# Altium PCB CSU18M88+CS1259-V1.1.PcbDoc (part 2 of 2)
Units mm, origin at the board's own origin, x right, y up, seen from the top; angles counter-clockwise.
Board outline 33.46 x 68.06 mm, 2 copper layers (TopLayer, BottomLayer); 63 components, 66 nets, 230 pads, 165 vias.
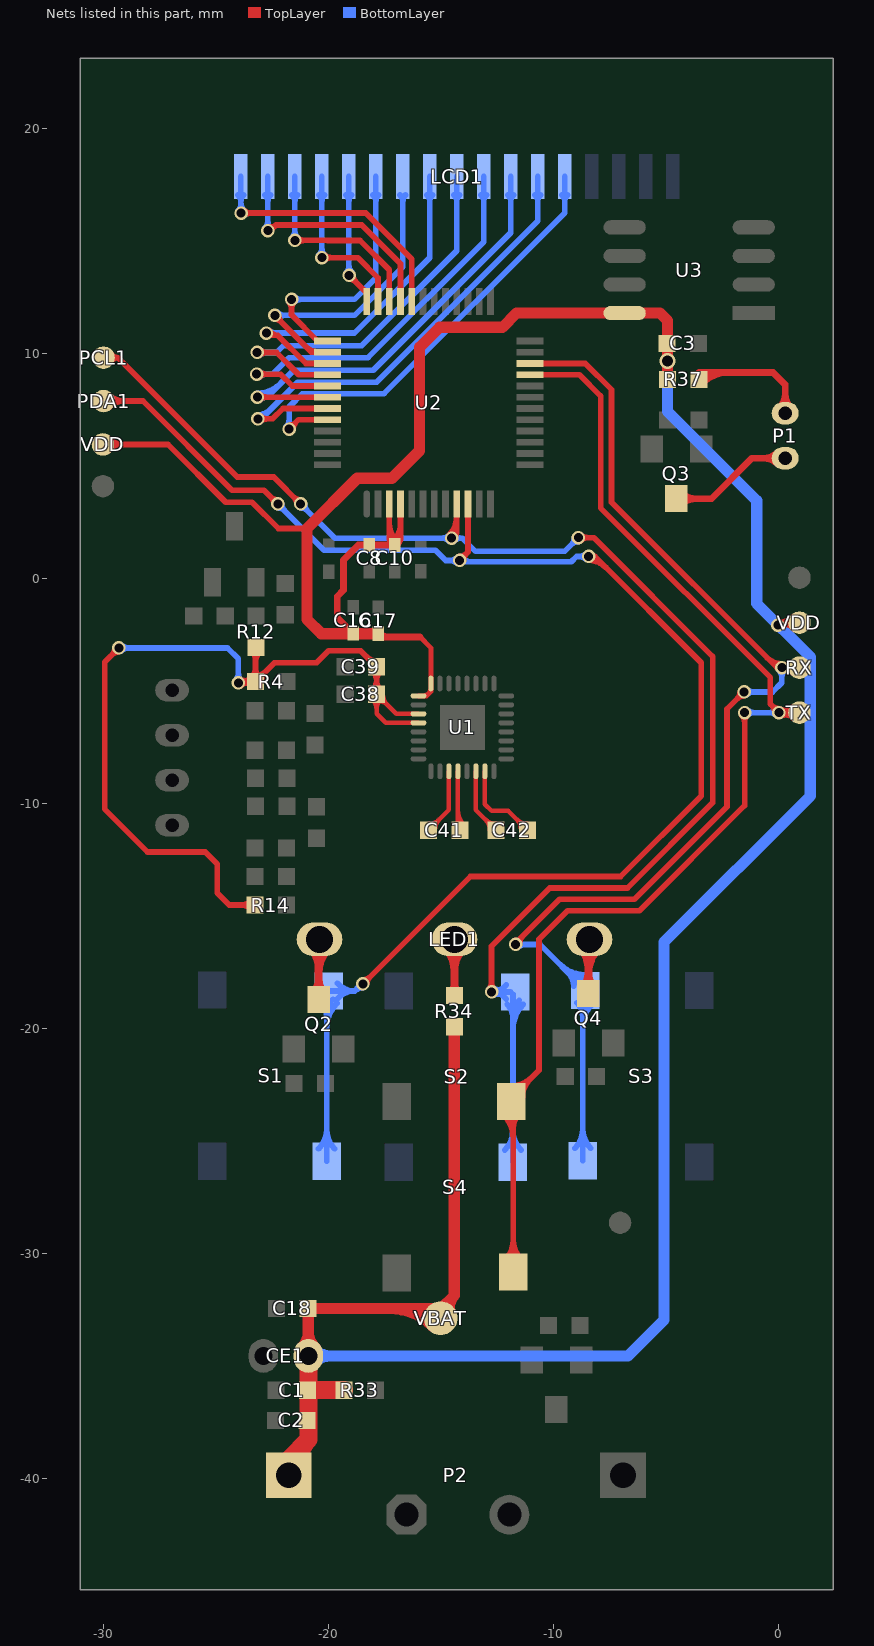
[diagram p2: the nets of this part, all layers, seen from the top]

## Via types
v1: diameter 0.6, hole 0.4, TopLayer to BottomLayer, 164 vias
v2: diameter 0.7, hole 0.5, TopLayer to BottomLayer, 1 vias

## Nets (pads, with @x,y where several pads share a name; then routed paths per layer and width w, separated by ;. In a path a pad name is that pad's centre, name@x,y a point inside that pad or via, vN(x,y) a via of type N, cw(c..) or ccw(c..) an arc to the next point about the centre after c; other vN are vias at no path point) (continued)
NetC41_1: C41.1 U1.12 | length 4.1
  TopLayer w0.2: C41.1@-14.346,-11.003 ccw(c-14.589,-10.761) -14.246,-10.761 ; -14.246,-10.768 ccw(c-13.715,-10.768) C41.1@-14.091,-11.144 ; -14.246,-10.285 ccw(c-13.232,-10.285) C41.1@-13.949,-11.003 ; U1.12@-14.246,-8.579 -14.246,-11.103 C41.1@-14.148,-11.201
NetC41_2: C41.2 U1.11 | length 4.1
  TopLayer w0.2: C41.2@-15.545,-11.201 -14.646,-10.303 U1.11@-14.646,-8.579 ; C41.2@-15.545,-10.92 ccw(c-15.545,-10.242) -15.065,-10.722 ccw(c-14.585,-11.201) C41.2@-15.264,-11.201
NetC42_1: C42.1 U1.14 | length 4.1
  TopLayer w0.2: U1.14@-13.446,-8.579 -13.446,-10.303 C42.1@-12.548,-11.201 ; C42.1@-12.829,-11.201 ccw(c-13.507,-11.201) -13.027,-10.722 ccw(c-12.548,-10.242) C42.1@-12.548,-10.92
NetC42_2: C42.2 U1.15 | length 4.9
  TopLayer w0.2: U1.15@-13.046,-8.579 -13.046,-10.042 -12.751,-10.338 -12.014,-10.338 C42.2@-11.151,-11.201 ; C42.2@-11.432,-11.201 ccw(c-12.11,-11.201) -11.63,-10.722 ccw(c-11.151,-10.242) C42.2@-11.151,-10.92
NetJ5_2: 
NetLED1_1: LED1.1 Q2.3 | length 6
  TopLayer w0.35: LED1.1@-20.803,-16.459 cw(c-21.695,-17.352) -20.433,-17.352 ; Q2.3@-20.663,-18.392 ccw(c-21.218,-17.837) -20.433,-17.837 ccw(c-19.649,-17.837) Q2.3@-20.203,-18.392 ; Q2.3@-20.433,-18.722 LED1.1@-20.433,-16.09 ; -20.433,-17.53 cw(c-18.919,-17.53) LED1.1@-19.99,-16.459
NetLED1_2: LED1.2 R34.2 | length 5.5
  TopLayer w0.254: LED1.2@-14.402,-16.058 LED1.2@-14.396,-16.053
  TopLayer w0.35: LED1.2@-14.803,-16.459 cw(c-15.771,-17.427) -14.402,-17.427 ; R34.2@-14.547,-18.396 ccw(c-14.899,-18.045) -14.402,-18.045 ccw(c-13.904,-18.045) R34.2@-14.256,-18.396 ; R34.2@-14.402,-18.542 LED1.2@-14.402,-16.058 ; -14.402,-17.455 cw(c-12.994,-17.455) LED1.2@-13.99,-16.459
NetLED2_1: 
NetLED2_2: LED1.3 Q4.3 | length 5.8
  TopLayer w0.254: LED1.3@-8.444,-16.101 LED1.3@-8.396,-16.053
  TopLayer w0.35: LED1.3@-8.803,-16.459 cw(c-9.668,-17.325) -8.444,-17.325 ; Q4.3@-8.674,-18.138 ccw(c-9.229,-17.583) -8.444,-17.583 ccw(c-7.66,-17.583) Q4.3@-8.215,-18.138 ; Q4.3@-8.444,-18.468 LED1.3@-8.444,-16.101 ; -8.444,-17.557 cw(c-6.892,-17.557) LED1.3@-7.99,-16.459
NetNTC2_1: 
NetP1_1: P1.2 R37.2 | length 8.6
  TopLayer w0.3: R37.2@-3.579,8.888 cw(c-2.961,8.27) -2.961,9.144 ; R37.2@-3.531,9.144 -0.229,9.144 0.305,8.611 P1.2@0.305,7.334 ; R37.2@-3.367,8.676 cw(c-2.237,7.546) -2.237,9.144 ; P1.2@0.057,7.581 ccw(c-0.54,8.179) 0.305,8.179 ccw(c1.15,8.179) P1.2@0.552,7.581
NetP1_2: P1.1 Q3.3 | length 8.5
  TopLayer w0.3: Q3.3@-4.586,3.279 Q3.3@-4.433,3.431 ; Q3.3@-4.535,3.533 -2.97,3.533 -1.168,5.334 P1.1@0.305,5.334 ; Q3.3@-4.287,3.285 cw(c-3.69,2.688) -3.69,3.533 cw(c-3.69,4.378) Q3.3@-4.287,3.78 ; P1.1@-0.043,5.087 ccw(c-0.64,4.489) -0.64,5.334 ccw(c-0.64,6.179) P1.1@-0.043,5.581
OBJ: 
OBJ-: 
PT24: PDA1.1 S1.1 S1.2 U2.10 | length 81.8
  TopLayer w0.254: PDA1.1@-29.997,7.874 -28.245,7.874 -24.282,3.912 -22.86,3.912 v1(-22.25,3.302) ; PDA1.1@-29.734,7.61 cw(c-29.097,6.974) -29.097,7.874 cw(c-29.097,8.774) PDA1.1@-29.734,8.138 ; v1@-22.423,3.302 ccw(c-22.841,3.302) -22.546,3.597 ccw(c-22.25,3.893) v1@-22.25,3.475 ; v1(-18.466,-18.034) -13.691,-13.259 -7.01,-13.259 -3.429,-9.677 -3.429,-3.759 -8.153,0.965 v1(-8.433,0.965) ; v1@-18.466,-17.861 ccw(c-18.466,-17.443) -18.17,-17.739 ccw(c-17.875,-18.034) v1@-18.293,-18.034 ; v1(-14.173,0.787) -13.795,1.166 U2.10@-13.795,3.298 ; v1@-14.173,0.96 ccw(c-14.173,1.378) -13.878,1.083 ccw(c-13.583,0.787) v1@-14,0.787 ; v1@-8.433,0.792 cw(c-8.433,-0.3) -7.661,0.472 ; v1@-8.433,1.046 cw(c-8.433,0.567) -8.094,0.906
  BottomLayer w0.254: v1@-22.25,3.129 cw(c-22.25,2.711) -21.955,3.007 cw(c-21.66,3.302) v1@-22.077,3.302 ; v1(-22.25,3.302) -20.193,1.245 -15.24,1.245 -14.783,0.787 v1(-14.173,0.787) -14.115,0.729 -9.202,0.729 -8.966,0.965 v1(-8.433,0.965) ; S1.2@-20.438,-25.367 ccw(c-21.305,-24.5) -20.079,-24.5 ccw(c-18.853,-24.5) S1.2@-19.72,-25.367 ; S1.1@-20.337,-18.898 cw(c-20.959,-19.519) -20.079,-19.519 ; S1.2@-20.079,-25.917 S1.1@-20.079,-18.449 ; -20.079,-20.01 cw(c-18.506,-20.01) S1.1@-19.618,-18.898 ; -20.079,-19.397 cw(c-19.119,-19.397) S1.1@-19.798,-18.718 ; S1.1@-19.977,-18.348 -18.83,-18.348 ; S1.1@-19.601,-18.689 cw(c-18.83,-19.388) -18.83,-18.348 ; S1.1@-19.601,-18.006 ccw(c-18.83,-17.307) -18.83,-18.348 ; -18.725,-18.243 ccw(c-18.934,-18.034) v1@-18.639,-18.034 ; v1@-18.472,-18.207 ccw(c-18.489,-18.689) -18.83,-18.348 ; v1(-18.466,-18.034) -18.517,-18.034 -18.83,-18.348 ; v1@-14.296,0.665 ccw(c-14.591,0.37) -14.591,0.787 ccw(c-14.591,1.205) v1@-14.296,0.91 ; v1@-14.051,0.91 ccw(c-13.615,1.346) -13.615,0.729 ; v1@-8.555,0.843 ccw(c-8.85,0.548) -8.85,0.965 ccw(c-8.85,1.383) v1@-8.555,1.088
PT25: PCL1.1 S2.1 S2.2 U2.9 | length 79.3
  TopLayer w0.254: PCL1.1@-29.997,9.804 -29.362,9.804 ; PCL1.1@-29.672,9.623 cw(c-29.362,9.45) -29.362,9.804 ; PCL1.1@-29.672,9.986 ccw(c-29.362,10.158) -29.362,9.804 ; v1@-21.407,3.302 ccw(c-21.825,3.302) -21.53,3.597 ccw(c-21.234,3.893) v1@-21.234,3.475 ; v1(-21.234,3.302) -22.428,4.496 -24.054,4.496 -29.362,9.804 ; v1@-14.651,1.9 ccw(c-15.511,2.761) U2.9@-14.295,2.761 ; v1(-14.529,1.778) -14.295,2.012 ; v1@-14.498,1.948 ccw(c-14.457,2.175) -14.295,2.012 ; v1@-14.472,1.721 ccw(c-14.898,2.147) -14.295,2.147 ; v1@-14.359,1.809 cw(c-14.132,1.849) -14.295,2.012 ; U2.9@-14.295,3.298 -14.295,2.012 ; v1@-12.873,-18.267 ccw(c-13.168,-17.972) -12.751,-17.972 ccw(c-12.333,-17.972) v1@-12.628,-18.267 ; v1(-12.751,-18.39) -12.751,-16.358 -10.16,-13.767 -6.706,-13.767 -2.921,-9.982 -2.921,-3.48 -8.204,1.803 v1(-8.89,1.803) ; v1@-8.768,1.681 cw(c-8.472,1.386) -8.472,1.803 cw(c-8.472,2.221) v1@-8.768,1.926
  BottomLayer w0.254: v1@-21.234,3.129 cw(c-21.234,2.711) -20.939,3.007 cw(c-20.644,3.302) v1@-21.061,3.302 ; v1(-21.234,3.302) -19.71,1.778 v1(-14.529,1.778) -14.046,1.778 -13.462,1.194 -9.5,1.194 v1(-8.89,1.803) ; v1@-14.651,1.656 ccw(c-14.946,1.36) -14.946,1.778 ccw(c-14.946,2.196) v1@-14.651,1.9 ; v1@-14.406,1.656 cw(c-14.111,1.36) -14.111,1.778 cw(c-14.111,2.196) v1@-14.406,1.9 ; v1@-12.664,-18.539 cw(c-12.455,-18.901) -12.347,-18.498 cw(c-12.239,-18.094) v1@-12.601,-18.303 ; v1@-12.664,-18.24 ccw(c-12.455,-17.878) -12.347,-18.282 ccw(c-12.239,-18.685) v1@-12.601,-18.476 ; v1@-12.628,-18.512 cw(c-12.333,-18.807) -12.333,-18.39 cw(c-12.333,-17.972) v1@-12.628,-18.267 ; S2.2@-12.158,-25.413 ccw(c-13.025,-24.546) -11.799,-24.546 ccw(c-10.572,-24.546) S2.2@-11.439,-25.413 ; S2.1@-12.096,-18.708 ccw(c-12.751,-19.222) v1(-12.751,-18.39) ; S2.1@-12.092,-18.075 cw(c-12.751,-17.544) v1(-12.751,-18.39) ; S2.1@-12.056,-18.943 cw(c-12.678,-19.565) -11.799,-19.565 ; S2.1@-11.904,-18.39 v1(-12.751,-18.39) ; S2.2@-11.799,-25.963 S2.1@-11.799,-18.495 ; -11.799,-20.056 cw(c-10.225,-20.056) S2.1@-11.338,-18.943 ; -11.799,-19.443 cw(c-10.838,-19.443) S2.1@-11.517,-18.764 ; v1@-9.063,1.803 cw(c-9.481,1.803) -9.185,1.508 cw(c-8.89,1.213) v1@-8.89,1.63
RX: RX.1 S3.1 S3.2 U2.22 | length 65.9
  TopLayer w0.254: v1(-11.684,-16.281) -11.684,-16.231 -9.728,-14.275 -6.401,-14.275 -2.286,-10.16 -2.286,-5.817 v1(-1.524,-5.055) ; v1@-11.684,-16.108 ccw(c-11.684,-15.813) -11.475,-16.022 ; v1@-11.511,-16.281 cw(c-10.971,-16.281) -11.353,-15.899 ; U2.22@-11.045,9.548 -8.583,9.548 -7.417,8.382 -7.417,3.378 -0.064,-3.975 v1(0.152,-3.975) ; v1@-1.697,-5.055 cw(c-2.115,-5.055) -1.819,-5.35 cw(c-1.524,-5.645) v1@-1.524,-5.228 ; -0.512,-3.526 ccw(c0.152,-2.862) v1@0.152,-3.802 ; v1@0.263,-4.107 cw(c0.414,-4.288) 0.475,-4.061 cw(c0.536,-3.834) v1@0.315,-3.915 ; v1@0.263,-3.842 ccw(c0.414,-3.661) 0.475,-3.888 ccw(c0.536,-4.115) v1@0.315,-4.034 ; v1@0.275,-4.097 cw(c0.57,-4.392) 0.57,-3.975 cw(c0.57,-3.557) v1@0.275,-3.852 ; RX.1@0.651,-4.211 ccw(c0.152,-4.619) v1(0.152,-3.975) ; RX.1@0.651,-3.738 cw(c0.152,-3.33) v1(0.152,-3.975) ; RX.1@0.94,-3.975 v1(0.152,-3.975)
  BottomLayer w0.254: v1(-11.684,-16.281) -10.592,-16.281 -8.692,-18.181 S3.1@-8.692,-25.894 ; v1@-11.562,-16.404 cw(c-11.266,-16.699) -11.266,-16.281 cw(c-11.266,-15.864) v1@-11.562,-16.159 ; -9.711,-17.162 ccw(c-8.591,-16.042) S3.2@-8.591,-17.626 ; -9.353,-17.52 cw(c-9.967,-18.134) S3.2@-9.099,-18.134 ; -9.277,-17.596 ccw(c-8.591,-16.909) S3.2@-8.591,-17.88 ; S3.1@-9.051,-25.344 ccw(c-9.919,-24.477) -8.692,-24.477 ccw(c-7.466,-24.477) S3.1@-8.333,-25.344 ; S3.2@-8.95,-18.874 cw(c-9.572,-19.496) -8.692,-19.496 ; -8.692,-19.987 cw(c-7.119,-19.987) S3.2@-8.231,-18.874 ; -8.692,-19.374 cw(c-7.732,-19.374) S3.2@-8.411,-18.695 ; v1(-1.524,-5.055) -0.254,-5.055 0.152,-4.648 v1(0.152,-3.975) ; v1@-1.402,-5.177 cw(c-1.106,-5.472) -1.106,-5.055 cw(c-1.106,-4.637) v1@-1.402,-4.932 ; v1@0.03,-4.097 cw(c-0.265,-4.392) 0.152,-4.392 cw(c0.57,-4.392) v1@0.275,-4.097
S1: 
S2: 
S3: 
S4: 
SEG0: LCD1.13 U2.44 | length 22.3
  TopLayer w0.254: v1(-21.742,6.629) -21.324,7.048 U2.44@-20.045,7.048 ; v1@-21.742,6.802 ccw(c-21.742,7.22) -21.447,6.925 ccw(c-21.152,6.629) v1@-21.569,6.629
  BottomLayer w0.254: v1@-21.865,6.752 ccw(c-22.16,7.047) -21.742,7.047 ccw(c-21.325,7.047) v1@-21.62,6.752 ; v1(-21.742,6.629) -21.742,7.62 -21.158,8.204 -17.526,8.204 -9.495,16.236 LCD1.13@-9.495,17.856 ; LCD1.13@-9.617,17.034 cw(c-9.912,16.739) -9.495,16.739 cw(c-9.077,16.739) LCD1.13@-9.372,17.034
SEG1: LCD1.12 U2.43 | length 23.3
  TopLayer w0.254: v1(-23.139,7.087) -22.479,7.087 -22.018,7.548 U2.43@-20.045,7.548 ; v1@-23.017,6.964 cw(c-22.722,6.669) -22.722,7.087 cw(c-22.722,7.504) v1@-23.017,7.209
  BottomLayer w0.254: v1(-23.139,7.087) -22.987,7.087 -21.361,8.712 -17.856,8.712 -10.695,15.874 LCD1.12@-10.695,17.856 ; v1@-23.139,7.26 ccw(c-23.139,8.045) -22.584,7.49 ; LCD1.12@-10.817,17.034 cw(c-11.112,16.739) -10.695,16.739 cw(c-10.277,16.739) LCD1.12@-10.572,17.034
SEG2: LCD1.11 U2.42 | length 23.7
  TopLayer w0.254: v1(-23.161,8.048) U2.42@-20.045,8.048 ; v1@-23.038,7.925 cw(c-22.743,7.63) -22.743,8.048 cw(c-22.743,8.465) v1@-23.038,8.17
  BottomLayer w0.254: v1@-23.161,7.967 ccw(c-23.161,8.794) -22.576,8.209 ; v1(-23.161,8.048) -22.737,8.048 -21.539,9.246 -18.009,9.246 -11.895,15.36 LCD1.11@-11.895,17.856 ; v1@-23.161,8.221 ccw(c-23.161,9.662) -22.142,8.643 ; v1@-23.038,7.925 cw(c-22.743,7.63) -22.743,8.048 cw(c-22.743,8.465) v1@-23.038,8.17 ; LCD1.11@-12.017,17.034 cw(c-12.312,16.739) -11.895,16.739 cw(c-11.477,16.739) LCD1.11@-11.772,17.034
SEG3: LCD1.10 U2.41 | length 20.8
  TopLayer w0.254: v1(-23.19,9.068) -22.123,9.068 -21.603,8.548 U2.41@-20.045,8.548 ; v1@-23.068,8.945 cw(c-22.773,8.65) -22.773,9.068 cw(c-22.773,9.485) v1@-23.068,9.19
  BottomLayer w0.254: v1(-23.19,9.068) -22.479,9.068 -21.742,9.804 -18.237,9.804 -13.095,14.947 LCD1.10@-13.095,17.856 ; v1@-23.068,8.945 cw(c-22.773,8.65) -22.773,9.068 cw(c-22.773,9.485) v1@-23.068,9.19 ; LCD1.10@-13.217,17.034 cw(c-13.512,16.739) -13.095,16.739 cw(c-12.677,16.739) LCD1.10@-12.972,17.034
SEG4: LCD1.9 U2.40 | length 19.5
  TopLayer w0.254: v1(-23.165,10.033) -22.301,10.033 -21.316,9.048 U2.40@-20.045,9.048 ; v1@-23.042,9.911 cw(c-22.747,9.615) -22.747,10.033 cw(c-22.747,10.451) v1@-23.042,10.155
  BottomLayer w0.254: v1(-23.165,10.033) -22.301,10.033 -21.996,10.338 -18.517,10.338 -14.295,14.56 LCD1.9@-14.295,17.856 ; v1@-23.042,9.911 cw(c-22.747,9.615) -22.747,10.033 cw(c-22.747,10.451) v1@-23.042,10.155 ; LCD1.9@-14.417,17.034 cw(c-14.712,16.739) -14.295,16.739 cw(c-13.877,16.739) LCD1.9@-14.172,17.034
SEG5: LCD1.8 U2.39 | length 17
  TopLayer w0.254: v1@-22.614,10.991 ccw(c-22.25,11.229) -22.25,10.795 ; v1@-22.555,10.795 -22.25,10.795 ; U2.39@-20.045,9.548 -21.003,9.548 -22.25,10.795
  BottomLayer w0.254: v1(-22.758,10.897) -18.847,10.897 -15.495,14.249 LCD1.8@-15.495,17.856 ; v1@-22.636,10.774 cw(c-22.341,10.479) -22.341,10.897 cw(c-22.341,11.314) v1@-22.636,11.019 ; LCD1.8@-15.617,17.034 cw(c-15.912,16.739) -15.495,16.739 cw(c-15.077,16.739) LCD1.8@-15.372,17.034
SEG6: LCD1.7 U2.38 | length 15.6
  TopLayer w0.254: v1@-22.377,11.511 cw(c-22.377,11.132) -22.109,11.4 ; v1(-22.377,11.684) -22.377,11.668 -20.757,10.048 U2.38@-20.045,10.048 ; v1@-22.204,11.684 ccw(c-21.748,11.684) -22.071,11.361 ; -20.982,10.273 ccw(c-20.495,10.76) U2.38@-20.495,10.071
  BottomLayer w0.254: v1(-22.377,11.684) -18.847,11.684 -16.695,13.836 -16.695,16.764 ; v1@-22.255,11.562 cw(c-21.96,11.266) -21.96,11.684 cw(c-21.96,12.102) v1@-22.255,11.806 ; LCD1.7@-16.817,17.034 cw(c-17.112,16.739) -16.695,16.739 cw(c-16.277,16.739) LCD1.7@-16.572,17.034 ; LCD1.7@-16.811,17.028 cw(c-17.053,16.764) -16.695,16.764 ; LCD1.7@-16.578,17.028 ccw(c-16.337,16.764) -16.695,16.764
SEG7: LCD1.6 U2.37 | length 13.4
  TopLayer w0.254: v1@-21.763,12.273 cw(c-22.058,11.978) -21.641,11.978 cw(c-21.223,11.978) v1@-21.518,12.273 ; v1(-21.641,12.395) -21.641,11.709 -20.479,10.548 U2.37@-20.045,10.548
  BottomLayer w0.254: v1(-21.641,12.395) -18.847,12.395 -17.895,13.347 LCD1.6@-17.895,17.856 ; v1@-21.518,12.273 cw(c-21.223,11.978) -21.223,12.395 cw(c-21.223,12.813) v1@-21.518,12.518 ; LCD1.6@-18.017,17.034 cw(c-18.312,16.739) -17.895,16.739 cw(c-17.477,16.739) LCD1.6@-17.772,17.034
SEG8: LCD1.5 U2.36 | length 8
  TopLayer w0.254: v1@-19.075,13.289 cw(c-19.075,12.871) -18.78,13.167 cw(c-18.485,13.462) v1@-18.902,13.462 ; v1(-19.075,13.462) -18.295,12.681 U2.36@-18.295,12.298 ; -18.447,12.834 ccw(c-18.295,12.987) U2.36@-18.295,12.771
  BottomLayer w0.254: LCD1.5@-19.217,17.034 cw(c-19.512,16.739) -19.095,16.739 cw(c-18.677,16.739) LCD1.5@-18.972,17.034 ; v1@-19.198,13.584 ccw(c-19.447,13.833) -19.095,13.833 ; v1@-19.095,13.462 LCD1.5@-19.095,17.856 ; -19.095,13.926 ccw(c-18.611,13.926) v1@-18.953,13.584
SEG9: LCD1.4 U2.35 | length 9.5
  TopLayer w0.254: v1(-20.295,14.249) -18.694,14.249 -17.795,13.35 U2.35@-17.795,12.298 ; v1@-20.172,14.127 cw(c-19.877,13.832) -19.877,14.249 cw(c-19.877,14.667) v1@-20.172,14.372
  BottomLayer w0.254: v1@-20.417,14.372 ccw(c-20.712,14.667) -20.295,14.667 ccw(c-19.877,14.667) v1@-20.172,14.372 ; LCD1.4@-20.417,17.034 cw(c-20.712,16.739) -20.295,16.739 cw(c-19.877,16.739) LCD1.4@-20.172,17.034 ; v1(-20.295,14.249) LCD1.4@-20.295,17.856
SEG10: LCD1.3 U2.34 | length 11
  TopLayer w0.254: v1(-21.495,15.018) -20.047,15.018 -20.041,15.011 -18.593,15.011 -17.295,13.713 U2.34@-17.295,12.298 ; v1@-21.372,14.895 cw(c-21.077,14.6) -21.077,15.018 cw(c-21.077,15.435) v1@-21.372,15.14
  BottomLayer w0.254: v1@-21.617,15.14 ccw(c-21.912,15.435) -21.495,15.435 ccw(c-21.077,15.435) v1@-21.372,15.14 ; LCD1.3@-21.617,17.034 cw(c-21.912,16.739) -21.495,16.739 cw(c-21.077,16.739) LCD1.3@-21.372,17.034 ; LCD1.3@-21.495,17.856 v1(-21.495,15.018) v1@-21.488,15.011
SEG11: LCD1.2 U2.33 | length 12.6
  TopLayer w0.254: v1@-22.682,15.342 -22.631,15.392 -22.327,15.697 ; v1@-22.642,15.62 ccw(c-22.547,15.918) -22.327,15.697 ; U2.33@-16.795,12.298 -16.795,13.975 -18.517,15.697 -22.327,15.697
  BottomLayer w0.254: v1@-22.817,15.578 ccw(c-23.112,15.873) -22.695,15.873 ccw(c-22.277,15.873) v1@-22.572,15.578 ; LCD1.2@-22.817,17.034 cw(c-23.112,16.739) -22.695,16.739 cw(c-22.277,16.739) LCD1.2@-22.572,17.034 ; LCD1.2@-22.695,17.856 v1(-22.695,15.456) v1@-22.631,15.392
SEG12: LCD1.1 U2.32 | length 13.9
  TopLayer w0.254: v1(-23.876,16.231) -18.339,16.231 -16.295,14.187 U2.32@-16.295,12.298 ; v1@-23.754,16.108 cw(c-23.458,15.813) -23.458,16.231 cw(c-23.458,16.648) v1@-23.754,16.353
  BottomLayer w0.254: LCD1.1@-24.017,17.034 cw(c-24.312,16.739) -23.895,16.739 cw(c-23.477,16.739) LCD1.1@-23.772,17.034 ; v1@-23.998,16.353 ccw(c-24.249,16.603) -23.895,16.603 ; -23.895,16.693 ccw(c-23.413,16.693) v1@-23.754,16.353 ; LCD1.1@-23.895,17.856 -23.895,16.249 v1(-23.876,16.231)
TX: S4.1 S4.2 TX.1 U2.21 | length 67.3
  TopLayer w0.254: S4.2@-12.241,-23.816 cw(c-13.353,-24.929) -11.78,-24.929 ; S4.1@-12.139,-30.286 ccw(c-13.006,-29.419) -11.78,-29.419 ccw(c-10.554,-29.419) S4.1@-11.421,-30.286 ; S4.2@-12.061,-23.637 cw(c-12.74,-24.315) -11.78,-24.315 ; S4.2@-11.882,-22.822 ccw(c-11.882,-22.13) S4.2@-11.393,-22.619 ; S4.2@-11.882,-22.568 ccw(c-11.882,-21.263) -10.959,-22.186 ; S4.1@-11.78,-30.836 -11.78,-23.007 -10.643,-21.869 -10.643,-16.053 -9.373,-14.783 -6.172,-14.783 -1.499,-10.109 v1@-1.499,-6.045 ; -11.78,-24.438 cw(c-10.9,-24.438) S4.2@-11.522,-23.816 ; S4.2@-11.374,-23.076 cw(c-10.226,-23.076) -11.037,-22.264 ; U2.21@-11.045,9.048 -8.845,9.048 -7.899,8.103 -7.899,3.124 -0.356,-4.42 -0.356,-5.594 v1(0.025,-5.975) TX.1@0.94,-5.975 ; v1@-1.627,-6.097 cw(c-1.935,-6.406) -1.499,-6.406 ; -1.499,-6.379 cw(c-1.1,-6.379) v1@-1.382,-6.097 ; v1@-0.148,-5.975 ccw(c-0.565,-5.975) -0.27,-5.679 ccw(c0.025,-5.384) v1@0.025,-5.802 ; v1@0.112,-6.124 cw(c0.327,-6.497) 0.438,-6.081 ; v1@0.112,-5.825 ccw(c0.327,-5.452) 0.438,-5.868 ; v1@0.148,-6.097 cw(c0.443,-6.392) 0.443,-5.975 cw(c0.443,-5.557) v1@0.148,-5.852 ; v1@0.175,-6.061 cw(c0.526,-6.264) 0.421,-5.872 ; v1@0.175,-5.888 ccw(c0.526,-5.685) 0.421,-6.077 ; TX.1@0.676,-6.238 ccw(c0.039,-6.875) 0.039,-5.975 ccw(c0.039,-5.074) TX.1@0.676,-5.711
  BottomLayer w0.254: v1(-1.504,-5.975) v1(0.025,-5.975) ; v1@-1.382,-6.097 cw(c-1.087,-6.392) -1.087,-5.975 cw(c-1.087,-5.557) v1@-1.382,-5.852 ; v1@-0.097,-6.097 ccw(c-0.392,-6.392) -0.392,-5.975 ccw(c-0.392,-5.557) v1@-0.097,-5.852
VBAT: 
VDD: C1.1 C2.1 C3.1 C8.1 C10.1 C16.2 C17.1 C18.1 CE1.1 P2.1 R33.1 R34.1 R37.1 U1.1 U1.32 U2.3 U2.4 U3.8 VBAT.1 VDD.1 | length 168.1
  TopLayer w0.22: U1.1@-15.996,-5.229 -15.643,-5.229 -15.446,-5.032 U1.32@-15.446,-4.679 -15.446,-3.096 -15.926,-2.616 ; U1.1@-15.761,-5.224 ccw(c-15.761,-4.928) -15.552,-5.138 ; -15.538,-5.124 ccw(c-15.748,-4.914) U1.32@-15.451,-4.914
  TopLayer w0.254: VDD.1@-30.023,5.944 -27.127,5.944 -24.562,3.378 -23.393,3.378 -22.225,2.21 -20.955,2.21 ; VDD.1@-29.759,5.68 cw(c-29.122,5.043) -29.122,5.944 cw(c-29.122,6.844) VDD.1@-29.759,6.207 ; -17.295,1.837 ccw(c-16.743,1.837) C10.1@-17.133,1.447 ; -17.295,2.45 ccw(c-16.13,2.45) C10.1@-16.954,1.627 ; U2.3@-17.295,3.298 -17.295,1.725 C10.1@-17.043,1.473 -16.795,1.722 U2.4@-16.795,3.298 ; C10.1@-17.133,1.627 ccw(c-17.95,2.443) -16.795,2.443 ; C10.1@-16.954,1.447 ccw(c-17.337,1.83) -16.795,1.83
  TopLayer w0.3: -19.184,-2.174 ccw(c-18.898,-1.889) C16.2@-18.898,-2.293 ; C16.2@-18.898,-2.46 -19.609,-1.749 -19.609,-0.813 -19.329,-0.533 -19.329,0.813 -18.669,1.473 C8.1@-18.186,1.473 C10.1@-17.043,1.473 ; C17.1@-17.706,-2.454 ccw(c-17.314,-2.062) -17.314,-2.616 ; C17.1@-17.628,-2.616 -15.926,-2.616 ; v1(-0.025,-2.083) 0.083,-1.975 VDD.1@0.94,-1.975 ; v1@0.081,-2.189 cw(c0.598,-2.706) VDD.1@0.598,-1.975 ; v1@0.105,-2.158 cw(c0.635,-2.464) VDD.1@0.477,-1.872 ; VDD.1@0.692,-2.222 ccw(c0.095,-2.82) 0.095,-1.975 ccw(c0.095,-1.13) VDD.1@0.692,-1.727
  TopLayer w0.5: CE1.1@-21.178,-34.187 ccw(c-21.86,-33.504) -20.895,-33.504 ccw(c-19.929,-33.504) CE1.1@-20.612,-34.187 ; C18.1@-20.904,-32.461 -14.986,-32.461 -14.402,-31.877 ; CE1.1@-20.895,-34.569 C18.1@-20.895,-32.471 ; C17.1@-17.78,-2.464 -20.32,-2.464 -20.955,-1.829 -20.955,2.21 -18.72,4.445 -17.17,4.445 -15.951,5.664 -15.951,10.262 -15.062,11.151 -12.268,11.151 -11.633,11.786 U3.8@-6.833,11.786 -5.258,11.786 -4.928,11.455 v2(-4.928,9.652) R37.1@-4.928,9.144 ; -17.261,-32.461 cw(c-17.261,-35.143) VBAT.1@-15.365,-33.247 ; -16.054,-32.461 cw(c-16.054,-33.935) VBAT.1@-15.011,-32.893 ; VBAT.1@-14.554,-32.691 cw(c-13.884,-32.395) -14.402,-31.877 ; R34.1@-14.402,-19.939 -14.402,-31.877
  TopLayer w0.8: P2.1@-21.766,-39.87 -21.766,-39.165 -20.895,-38.294 ; P2.1@-21.189,-39.653 cw(c-19.986,-39.202) -20.895,-38.294 ; C1.1@-20.93,-36.093 C1.1@-20.895,-36.093 ; CE1.1@-20.895,-34.569 C1.1@-20.895,-36.093 ; R33.1@-19.304,-36.093 C1.1@-20.895,-36.093 ; -20.895,-38.294 C1.1@-20.895,-36.093
  BottomLayer w0.5: CE1.1@-20.895,-34.569 -6.68,-34.569 -5.08,-32.969 -5.08,-16.175 1.422,-9.673 1.422,-3.505 -0.965,-1.118 -0.965,3.454 -4.928,7.417 v2(-4.928,9.652) ; CE1.1@-20.612,-34.852 cw(c-19.929,-35.535) -19.929,-34.569 cw(c-19.929,-33.604) CE1.1@-20.612,-34.287
VREF_EN: 
VS: C38.1 C39.1 R4.1 R12.1 R14.2 U1.3 U1.4 | length 51.5
  TopLayer w0.2: C38.1@-18.055,-5.355 cw(c-18.535,-5.835) -17.856,-5.835 cw(c-17.178,-5.835) C38.1@-17.658,-5.355 ; C38.1@-17.856,-5.437 cw(c-17.856,-6.116) -17.377,-5.636 cw(c-16.897,-5.156) C38.1@-17.575,-5.156 ; C38.1@-17.856,-5.334 -17.856,-6.02 -17.447,-6.429 U1.4@-15.996,-6.429 ; C38.1@-17.856,-5.156 -16.983,-6.029 U1.3@-15.996,-6.029
  TopLayer w0.254: v1@-29.485,-3.099 cw(c-29.902,-3.099) -29.607,-3.394 cw(c-29.312,-3.689) v1@-29.312,-3.272 ; v1(-29.312,-3.099) -29.947,-3.734 -29.947,-10.262 -28.042,-12.167 -25.476,-12.167 -24.943,-12.7 -24.943,-13.995 -24.409,-14.529 R14.2@-23.266,-14.529 ; v1(-24.003,-4.648) R4.1@-23.292,-4.648 ; v1@-23.977,-4.648 ccw(c-23.977,-3.862) -23.421,-4.418 ccw(c-23.854,-3.984) -23.241,-3.984 ccw(c-22.628,-3.984) R4.1@-23.061,-4.418 ; v1@-23.913,-4.5 ccw(c-23.701,-4.151) R4.1@-23.595,-4.546 ; v1@-23.881,-4.771 cw(c-23.585,-5.066) -23.585,-4.648 cw(c-23.585,-4.231) v1@-23.881,-4.526 ; v1@-23.867,-4.755 cw(c-23.688,-4.895) -23.629,-4.676 ; v1@-23.853,-4.735 cw(c-23.511,-4.932) R4.1@-23.614,-4.551 ; v1@-23.732,-4.648 cw(c-23.732,-5.088) R4.1@-23.421,-4.777 ; R14.2@-23.446,-14.708 ccw(c-23.88,-15.142) -23.88,-14.529 ccw(c-23.88,-13.916) R14.2@-23.446,-14.349 ; R12.1@-23.395,-3.253 cw(c-23.767,-3.625) -23.241,-3.625 ; R4.1@-23.241,-4.343 ccw(c-23.241,-3.73) -22.807,-4.164 ccw(c-22.374,-4.597) R4.1@-22.987,-4.597 ; -23.241,-3.748 cw(c-22.541,-3.748) R12.1@-23.036,-3.253 ; R12.1@-23.241,-3.099 R4.1@-23.241,-4.597 -22.403,-3.759 -20.523,-3.759 -19.99,-3.226 -18.567,-3.226 C39.1@-17.856,-3.937 ; C39.1@-18.11,-3.937 ccw(c-18.723,-3.937) -18.29,-3.503 ccw(c-17.856,-3.07) C39.1@-17.856,-3.683 ; C38.1@-18.036,-4.977 ccw(c-18.469,-4.543) -17.856,-4.543 ccw(c-17.243,-4.543) C38.1@-17.677,-4.977 ; C39.1@-18.036,-4.117 cw(c-18.469,-4.55) -17.856,-4.55 cw(c-17.243,-4.55) C39.1@-17.677,-4.117 ; C39.1@-17.99,-4.153 cw(c-18.141,-4.394) -17.856,-4.394 ; C38.1@-17.856,-5.334 C38.1@-17.856,-5.156 -17.856,-4.394 ; C39.1@-17.722,-4.153 ccw(c-17.572,-4.394) -17.856,-4.394
  BottomLayer w0.254: v1(-29.312,-3.099) -24.486,-3.099 -24.003,-3.581 v1(-24.003,-4.648) ; v1@-29.189,-3.221 cw(c-28.894,-3.516) -28.894,-3.099 cw(c-28.894,-2.681) v1@-29.189,-2.976 ; v1@-24.125,-4.526 ccw(c-24.421,-4.231) -24.003,-4.231 ccw(c-23.585,-4.231) v1@-23.881,-4.526
pads on no net: U1.10 U1.16 U1.17 U1.18 U1.19 U1.20 U1.21 U1.22 U1.23 U1.24 U1.25 U1.26 U1.27 U2.6 U2.7 U2.12 U2.16 U2.25 U2.26 U2.27 U2.28 U2.29 U2.30 U2.31

## Polygon pours and split planes (outlines as drawn)
GND on TopLayer "TopLayer-No Net" (hatched 90Degree grid 0.254 track 0.254, remove dead copper, pour order 4): -31.293,-44.628 -31.293,9.347 -31.293,22.428 -30.861,22.86 -30.81,22.911 -18.898,22.911 1.778,22.911 2.057,22.631 2.743,21.946 2.743,19.304 2.743,-44.907 2.057,-45.593 1.676,-45.212 -31.013,-45.212
GND on BottomLayer "TopLayer-No Net" (hatched 90Degree grid 0.254 track 0.254, remove dead copper, pour order 6): -27.381,-43.434 -27.381,-19.177 -30.201,-16.358 -31.013,-15.545 -31.013,-11.481 -31.013,20.777 -28.727,23.063 -28.575,23.216 -18.313,23.216 -0.229,23.216 2.134,20.853 2.591,20.396 2.591,10.008 2.591,-14.656 0.152,-17.094 -0.965,-18.212 -0.965,-36.347 -0.965,-43.815 -2.057,-44.907 -2.413,-44.552 -24.816,-44.552

## Keep-outs
KeepOutLayer:
  circle w0.051: c-4.199,-40.437 r0.75
  circle w0.051: c-24.239,-40.411 r0.75
  circle w0.1: c-26.295,-15.444 r0.98
  circle w0.1: c-2.295,-15.444 r0.98
  circle w0.1: c-4.295,20.686 r0.98
  circle w0.1: c-14.295,20.686 r0.98
  circle w0.1: c-24.295,20.686 r0.98
  lines w0.051: -31,16.013 -31,18.451 -29.095,20.356 ; -31,16.47 -31,13.473 -29.12,13.473 -29.12,11.949 -31,11.949 -31,3.084 -29.095,3.084 -29.095,1.052 -31,1.052 ; -25.295,-42.012 -26.885,-40.421 -26.885,-38.673 -26.809,-38.597 -25.285,-38.597 -25.285,-36.464 -26.936,-36.464 -26.885,-36.413 -26.885,-31.003 ; -25.295,-29.543 -25.295,-30.962 ; -25.28,-42.026 -18.706,-42.026 ; -19.476,-42.026 -18.706,-42.026 ; -9.704,-42.012 -3.295,-42.012 -1.704,-40.421 -1.704,-38.673 -1.781,-38.597 -3.305,-38.597 -3.305,-36.464 -1.654,-36.464 -1.704,-36.413 -1.704,-31.003 -3.254,-31.003 -3.295,-30.962 -3.295,-28.844 0.505,-12.044 2.41,-10.139 2.41,1.052 0.505,1.052 0.505,3.084 2.41,3.084 2.41,11.949 0.531,11.949 0.531,13.473 2.41,13.473 2.41,16.47 ; -9.037,-42.012 -9.769,-42.012 -10.485,-42.727 -10.485,-43.917 -11.501,-44.933 -17.114,-44.933 -18.135,-43.912 -18.135,-42.598 -18.206,-42.526 -18.706,-42.026 ; 0.505,20.356 2.41,18.451 2.41,16.013 ; -31,-10.139 -31,1.052 ; -31,-10.139 -29.095,-12.044 -25.295,-28.844 -25.295,-30.962 ; -31,-10.139 -31,1.052 ; -26.885,-31.003 -25.335,-31.003 ; -26.885,-31.003 -25.335,-31.003 ; -25.335,-31.003 -25.295,-30.962 ; -25.335,-31.003 -25.295,-30.962
  lines w0.1: -29.095,20.356 -24.295,23.056 -14.295,23.056 -4.295,23.056 0.505,20.356

## Other copper
BottomLayer:
  rectangle: -27.838,-11.709 -26.01,-4.369

## Silkscreen, mask and mechanical layers (free items; w line width, h text height)
TopOverlay:
  circle w0.1: c-26.295,-15.444 r1.25
  circle w0.1: c-2.295,-15.444 r1.25
  circle w0.1: c-4.295,20.686 r1.25
  circle w0.1: c-14.295,20.686 r1.25
  circle w0.1: c-24.295,20.686 r1.25
  lines w0.254: -16.318,-27.085 -12.526,-27.085 ; -14.378,-28.863 -14.378,-25.18
  text "CSU18M88+CS1258-V1.0" at -28.671,17.475 h1.02
  text "2020/02/15" at -7.487,17.323 h0.91
  text "S2" at -26.187,9.627 h0.5
  text "S1" at -26.137,7.595 h0.5
  text "S3" at -3.048,-4.267 h0.5
  text "1" at -30.226,-5.563 h1
  text "S4" at -2.921,-6.909 h0.5
  text "2" at -30.429,-7.29 h1
  text "3" at -30.404,-9.042 h1
  text "4" at -30.48,-10.744 h1
  text "BAT+" at -25.654,-39.522 h0.7
  text "BAT-" at -5.41,-39.548 h0.7
BottomOverlay:
  text "SET" at -14.904,-33.63 h0.5 r90
  text "+" at -18.13,-33.68 h1.02
  text "-" at -12.974,-33.807 h1.02

## Text inside footprints (layer, text, board x,y; h text height)
LCD1: BottomOverlay "Body_Temp." at -10.795,9.856 h1.27; BottomOverlay "Surface_Temp." at -10.795,12.856 h1.27; BottomOverlay "*" at -5.647,-9.982 h3; BottomOverlay "F" at -24.168,-0.414 h1.6; BottomOverlay "C" at -24.168,-3.414 h1.6; BottomOverlay "Memery" at -4.295,6.856 h1.27; BottomOverlay "Emissivity" at -4.389,3.988 h1.27
U7: TopOverlay "E" at -23.343,0.66 h0.56; TopOverlay "C" at -24.308,0.991 h0.56; TopOverlay "B" at -25.324,0.61 h0.56